# Altium PCB LED_B.PcbDoc
Units mil, origin at the board's own origin, x right, y up, seen from the top; angles counter-clockwise.
Board outline 835 x 2600 mil, 2 copper layers (Top Layer, Bottom Layer); 16 components, 11 nets, 67 pads, 1 vias.
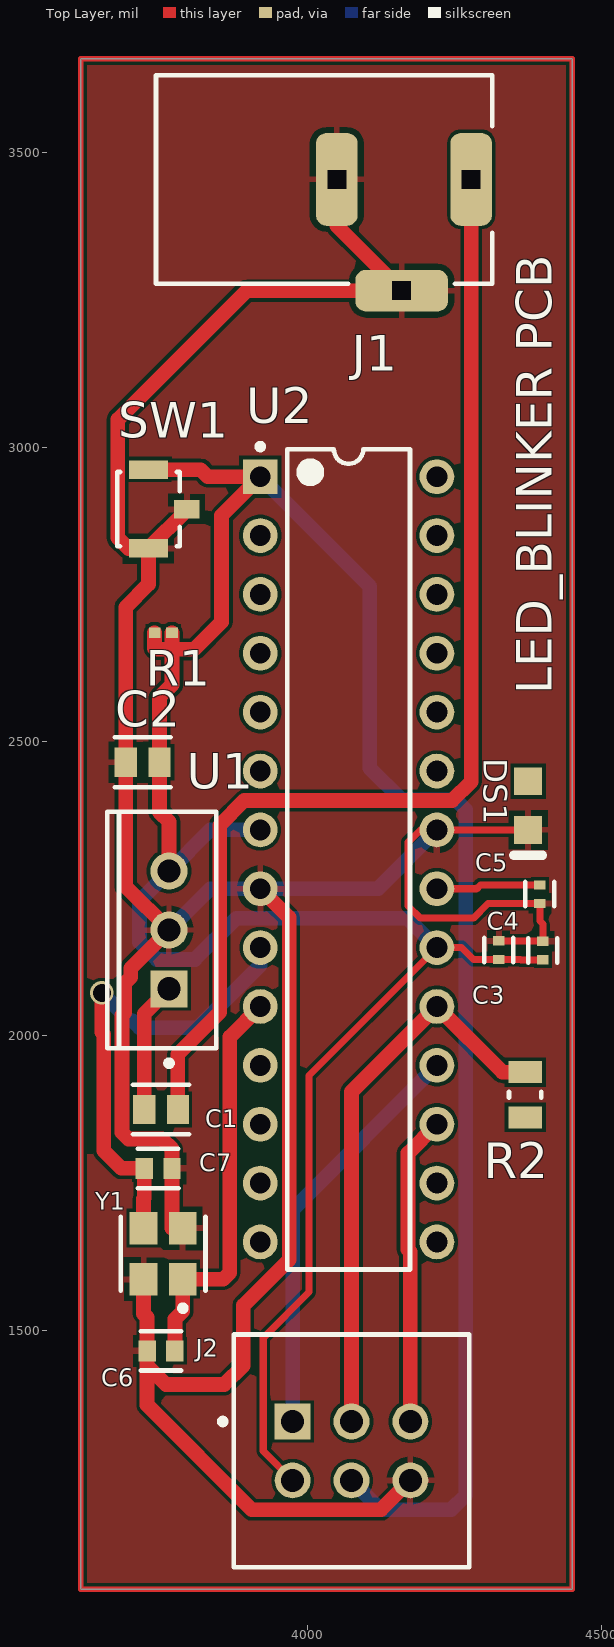
[diagram p0: Top Layer view]
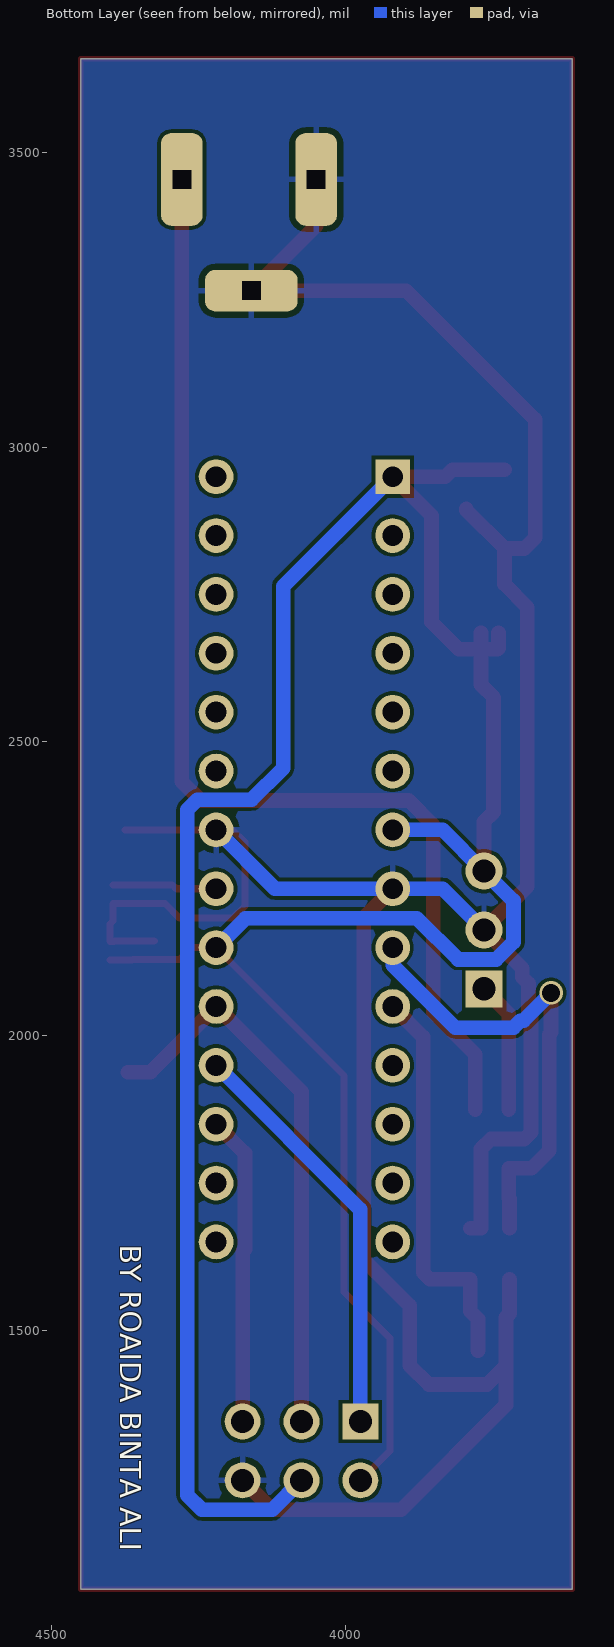
[diagram p1: Bottom Layer view, seen from below]
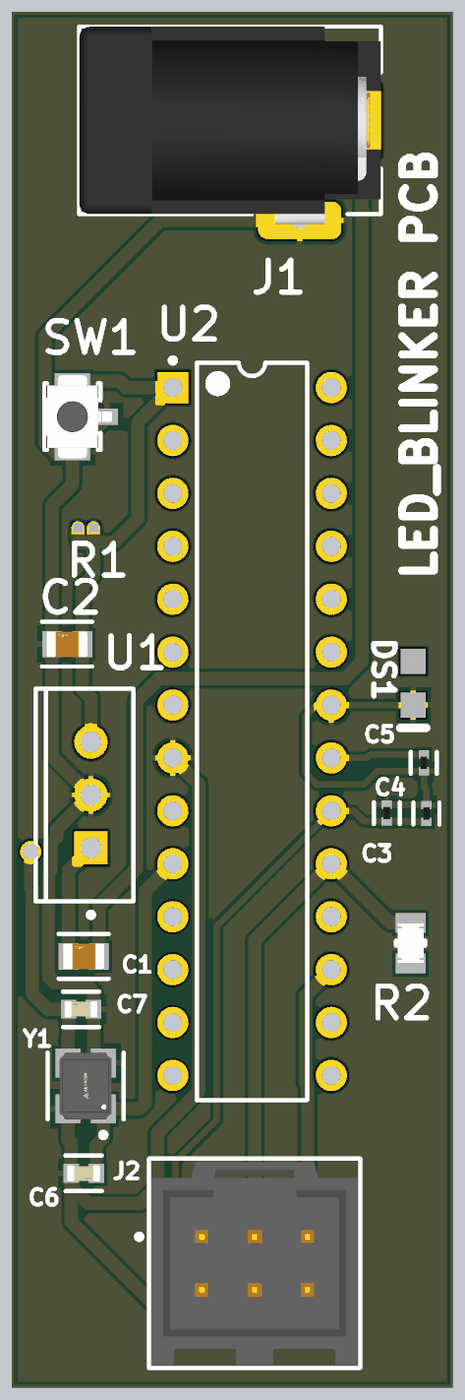
[diagram p2: 3D render of the assembled board from above, using the file's embedded part models]

## Layer stack, top to bottom
Top Solder: solder mask 0.4, Solder Resist, Dk 3.5
Top Layer: signal copper 1.4
Dielectric 1: dielectric 12.6, FR-4, Dk 4.8
Bottom Layer: signal copper 1.4
Bottom Solder: solder mask 0.4, Solder Resist, Dk 3.5

## Board outline
3615,1060 3615,3660 4450,3660 4450,1060

## Design rules (kind name [scope] priority, off if disabled: settings)
Clearance [All] p1: gap=6 ignorepadtopadclearanceinfootprint=TRUE
ComponentClearance [All] p1: gap=10 collisioncheckmode=3 verticalgap=6 showdistances=FALSE
HoleToHoleClearance [All] p1: gap=6 allowstackedmicrovias=TRUE
MinimumSolderMaskSliver [All] p1: minsoldermaskwidth=6
PlaneClearance [All] p1: clearance=10
PlaneConnect [All] p1: planeconnectstyle=Direct reliefexpansion=20 reliefentries=4 reliefconductorwidth=10 reliefairgap=10
PolygonConnect [All] p1: connectstyle=Relief reliefconductorwidth=10 reliefentries=4 polygonreliefangle="90 Angle" airgapwidth=10
RoutingVias [All] p1: holewidth=20 width=30 viastyle="Through Hole" minholewidth=10 minwidth=10 maxholewidth=30 maxwidth=50
SilkToSilkClearance [All] p1: silktosilkclearance=6
SilkToSolderMaskClearance [IsPad] p1: minsilkscreentomaskgap=6 clearancetoexposedcopper=TRUE
SolderMaskExpansion [All] p1: expansion=4 istentingtop=FALSE
SupplyNets "Schematic Supply Nets" [InNet('GND')] p1: voltage=0.000
Width [All] p1: maxlimit=30 minlimit=10 preferedwidth=25
23 further rules are at their usual default settings.

## Components (designator, comment, footprint, x,y, rotation, side; value= is the part's Value field where it differs from the comment)
C1 "10uF" FP-GRM21B-0_1-IPC_C 3751.37,1875 r180 top
C2 "10uF" FP-GRM21B-0_1-IPC_C 3720,2465 r180 top
C3 "100nF" FP-GRM15-MFG 4400,2145 r90 top value=0.10μF
C4 "100nF" FP-GRM15-MFG 4325,2145.75 r270 top value=0.10μF
C5 "100nF" FP-GRM15-MFG 4395,2240.75 r90 top value=0.10μF
C6 "22pF" FP-C0603C-CF-MFG 3751.38,1465 r180 top value="22 pF"
C7 "22pF" FP-C0603C-CF-MFG 3746.38,1775 r0 top value="22 pF"
DS1 "HSMG-C170" AVAG-HSMX-C170_V 4375,2391.34 r270 top
J1 "694108301002" 694108301002 4028.35,3455 r270 top
J2 "90130-1206" FP-90130-1206-MFG 4075,1295 r0 top
R1 "10k" RESC1005X40X25LL05T10 3755.24,2685 r0 top
R2 "330" FP-CRCW0805-e3-MFG 4370,1900 r90 top
SW1 "B3U-1100PM" FP-B3U-1100PM-MFG 3730.04,2895 r90 top
U1 "LM7805CT" FAIR-TO-220-3 3765,2180 r180 top
U2 "ATmega328P-PU" 28P3 4070,2300 r0 top
Y1 "ABM8G-16.000MHZ-18-D2Y-T" FP-ABM8G-MFG 3755,1630 r90 top

## Footprints (in the part's own frame and the unit in brackets; to place one, negate y for a bottom-side part, rotate by r counter-clockwise, add the part's x,y. Pads: shape width x height; smd on the part's side, far side on the other; paste and mask are expansions set on the pad)
28P3 [mm] "28-Pin Plastic Dual In-Line Package (PDIP)"
  rect 1.5x1.5 hole 0.9: 1(-3.81,16.51)
  round 1.5 hole 0.9: 2(-3.81,13.97) 3(-3.81,11.43) 4(-3.81,8.89) 5(-3.81,6.35) 6(-3.81,3.81) 7(-3.81,1.27) 8(-3.81,-1.27) 9(-3.81,-3.81) 10(-3.81,-6.35) 11(-3.81,-8.89) 12(-3.81,-11.43) 13(-3.81,-13.97) 14(-3.81,-16.51) 15(3.81,-16.51) 16(3.81,-13.97) 17(3.81,-11.43) 18(3.81,-8.89) 19(3.81,-6.35) 20(3.81,-3.81) 21(3.81,-1.27) 22(3.81,1.27) 23(3.81,3.81) 24(3.81,6.35) 25(3.81,8.89) 26(3.81,11.43) 27(3.81,13.97) 28(3.81,16.51)
  silkscreen extent -3.93,-17.7 2.65,17.93, body extent -3.6,-17.65 3.6,17.65, height 4.58
694108301002 [mm] "DC Power Jack Right Angled(6.4)"
  rrect50% 4x1.8 hole 0.8 square: 1(0,6.35) 2(0,0.55)
  rrect50% 1.8x4 hole 0.8 square: 3(4.8,3.35)
  silkscreen extent -4.5,-7.25 4.5,7.25, body extent -4.5,-7.25 5,7.25, height 10.75
AVAG-HSMX-C170_V [mm] "SMD, 2-Leads, Body 2x1.25mm, Height 0.8mm"
  rect 1.2x1.2 smd: 1(-1.05,0) 2(1.05,0)
  silkscreen extent 2.15,-0.62 2.15,0.62, body extent -1,-0.63 1,0.63, height 0.8
FAIR-TO-220-3 [mm] "FM, 3-Leads, Body 10.2x4.7mm, Pitch 2.54mm"
  rect 1.6x1.6 hole 1: 1(0,2.54)
  round 1.6 hole 1: 2(0,0) 3(0,-2.54)
  silkscreen extent -2.04,-5.1 2.66,5.87, body extent -2.04,-5.1 2.66,5.1, height 18.95
FP-90130-1206-MFG [mm]
  rect 1.55x1.55 hole 1 paste-2539.97 mask+0: 1(-2.54,1.27)
  round 1.55 hole 1 paste-2539.97 mask+0: 2(-2.54,-1.27) 3(0,1.27) 4(0,-1.27) 5(2.54,1.27) 6(2.54,-1.27)
  silkscreen extent -5.68,-5.02 5.08,5.02, body extent -5.18,-5.13 5.18,5.13, height 0.25
FP-ABM8G-MFG [mm]
  rect 1.4x1.2 smd paste+0 mask+0: 1(-1.1,-0.85) 2(1.1,-0.85) 3(1.1,0.85) 4(-1.1,0.85)
  silkscreen extent -2.47,-1.82 1.6,1.82, body extent -1.9,-1.55 1.9,1.55, height 0.25
FP-B3U-1100PM-MFG [mm]
  rect 0.8x1.7 smd paste+0 mask+0: 1(1.7,0) 2(-1.7,0)
  rect 0.8x1.1 smd paste+0 mask+0: 3(0,-1.65)
  silkscreen extent -1.6,-1.35 1.6,1.35, body extent -2.2,-2.3 2.2,1.45, height 0.25
FP-C0603C-CF-MFG [mm]
  rect 0.75x0.9 smd paste+0 mask+0: 1(-0.6,0) 2(0.6,0)
  silkscreen extent -0.87,-0.85 0.88,0.85, body extent -1.2,-0.6 1.2,0.6, height 0.25
FP-CRCW0805-e3-MFG [mm]
  rect 0.95x1.45 smd paste+0 mask+0: 1(-0.975,0) 2(0.975,0)
  silkscreen extent -0.13,-0.7 0.13,0.7, body extent -1.55,-0.82 1.55,0.82, height 0.25
FP-GRM15-MFG [mm]
  rect 0.4x0.5 smd paste+0 mask+0: 1(-0.4,0) 2(0.4,0)
  silkscreen extent -0.53,-0.62 0.53,0.62, body extent -0.7,-0.38 0.7,0.38, height 0.25
FP-GRM21B-0_1-IPC_C [mil]
  rect 37.71x49.69 smd paste+0 mask+0: 1(-28.63,0) 2(28.63,0)
  silkscreen extent -47,-42 47,42, body extent -51,-31 51,31, height 10
RESC1005X40X25LL05T10 [mm] "Chip Resistor, 2-Leads, Body 1.00x0.50mm, IPC High Density"
  rect 0.5x0.45 smd: 1(-0.375,0) 2(0.375,0)
  body extent -0.53,-0.27 0.53,0.28, height 0.4

## Part data
C1 C2: library part CMP-2007-03453-2, "Chip Multilayer Ceramic Capacitors for General Purpose, 0805, 10uF, X5R, 15%, 10%, 16V", Case Code (Imperial)=0805, Case Code (Metric)=2012, Dielectric=X5R, Max Operating Temperature=85°C, Min Operating Temperature=-55°C, Package Quantity=1, Tolerance=10%, Voltage=16V, Capacitance=10uF, Case/Package=0805, Depth=1.25mm, Height=1.25mm, Lead Free="Lead Free", Length=2mm, Material=Ceramic, Mount="Surface Mount", Packaging="Tape and Reel", Radiation Hardening=No, REACH SVHC="No SVHC", Termination=SMD/SMT, Thickness=0.053inch, Voltage Rating=16V, Voltage Rating (DC)=16V, Width=1.25mm
C3 C4 C5: library part CMP-2100-03641-2, "CAP CER 0.1UF 16V X7R 0402", Capacitance=0.10μF, Manufacturer=Murata, Manufacturer Part Number=GRM155R71C104KA88D, Package=GRM15, Temperature="-55°C to +125°C", Temperature Characteristic=X7R, Temperature Range High=+125°C, Temperature Range Low=-55°C, Tolerance=10%, Voltage Rating=16Vdc, Category=Cap, ComponentLink2Description=Datasheet, ComponentLink2URL=https://search.murata.co.jp/Ceramy/image/img/A01X/G101/ENG/GRM155R71H471KA01-01A.pdf, Device Class L1="Passive Components", Device Class L2=Capacitors, Device Class L3="Ceramic Capacitors", Digikey Description="CAP CER 0.1UF 16V X7R 0402", Height=0.55mm, Ipc Land Pattern Name=CAPC10050X219, Lead Free=yes, Material=Ceramic, Mouser Description="0402 0.1 uF 16V ±10 % Tolerance X7R SMT Multilayer Ceramic Capacitor", Octopart=https://octopart.com/grm155r71c104ka88d-murata-196880, RoHS=TRUE, Standoff Height=0mm
C6 C7: library part CMP-2006-03465-2, "CAP CER 22PF 16V 10% NP0 0603", Capacitance="22 pF", Manufacturer=KEMET, Manufacturer Part Number=C0603C220K4GACTU, Package=C0603C-CF, Temperature="-55°C to +125°C", Temperature Characteristic=C0G, Temperature Coefficient=30ppm/°C, Temperature Range High=+125°C, Temperature Range Low=-55°C, Tolerance=0.1, Voltage Rating="16 V", Automotive=Yes, Automotive Grade="Grade 1", Category=Cap, ComponentLink2Description=Datasheet, ComponentLink2URL=https://api.kemet.com/component-edge/download/datasheet/C0603C100J5GACAUTO.pdf, Device Class L1="Passive Components", Device Class L2=Capacitors, Device Class L3="Ceramic Capacitors", Digikey Description="CAP CER 22PF 16V 10% NP0 0603", Height=0.87mm, Lead Free=Yes, Material=Ceramic, Mouser Description="Multilayer Ceramic Capacitors MLCC - SMD/SMT 16volts 22pF C0G 10%", Octopart=https://octopart.com/c0603c220k4gactu-kemet-17097913, RoHS=TRUE
DS1: library part CMP-2000-05062-1, "Chip LED, Green, 2.2 V, -40 to 85 degC, 2-Pin SMD, Pb-Free, Tape and Reel", Forward Current If=20mA, Forward Voltage=2.2V, Forward Voltage VF Max=2.6V, LED Colour=Green, Manufacturer=Avago, Operating Temperature Max=85degC, Operating Temperature Min=-30degC, Operating Temperature Range=-30degCto+85degC, Opto Case Style=SMD, Package Description="2-Pin Surface Mount Device, Body 2 x 1.25 mm, Height 0.8 mm", Package Reference=HSMX-C170, Storage Temperature Min=-40degC, Bulb Size=1.25mmx1.4mm, Datasheet URL=https://datasheet.ciiva.com/29280/180495-da-01-en-chip-led-hsmg-c170-gelb-gruen-29280971.pdf, Datasheet Version=Oct-08, Dominant Wavelength=572nm, Dominant Wavelength Typ=572nm, External Depth=0.8mm, External Length / Height=2mm, External Width=1.25mm, Forward Current If Max=20mA, LED Mounting=SMD, LED Type=Standard, Lens Shape=Rectangular, Light Area Height=1mm, Luminous Intensity=15mcd, Luminous Intensity Min=4mcd, Luminous Intensity Typ=15mcd, Manufacturer URL=http://www.avagotech.com/, Mounting Type=SMD, MSL=MSL2A-4weeks, No. of Pins=2, Opto Mounting Orientation=Top, Packaging=CutTape, Peak Forward Current=20mA, Peak Wavelength=570nm, PIV Max=5V, Storage Temperature Max=85degC, SVHC=NoSVHC(16-Jun-2014), Viewing Angle=170deg, Voltage Vf Typ=2.2V, Wavelength Typ=570nm
J1: library part CMP-1502-00190-3, Color=Black, Current Rating=5A, Flammability Rating="UL94 V-0", Insulation Resistance=100MΩ, Max Operating Temperature=85°C, Min Operating Temperature=-40°C, Operating Supply Voltage=24V, Voltage Rating (DC)=20V, Connector Type=Power, Contact Gender=Female, Contact Material="Gold, Tin", Contact Plating=Tin, Gender=Male, Height=11mm, Housing material=Polyamide, Mount="Through Hole", NexarPartId=52676102, Number of Contacts=3, Packaging=Bulk, REACH SVHC=Unknown, RoHS=Compliant, Shielding=Unshielded, Termination="Through Hole", Voltage Rating=24V
J2: library part CMP-04776-000468-1, "CONN HEADER VERT 6POS 2.54MM", Color=Black, Contact Resistance=20mR, Current Rating=3A, Insulation Resistance=5GR, Max Current Rating=3.9A, Max Operating Temperature=125°C, Max Voltage Rating (AC)=500V, Max Voltage Rating (DC)=350.35kV, Min Operating Temperature=-55°C, Package Quantity=2560, Voltage Rating=350V, Contact Gender=Male, Contact Material=Brass, Contact Plating=Gold, Depth=3.94mm, Gender=Male, Glow Wire Compliant=Non-compliant, Height=4.7mm, Housing Color=Black, Housing material=Polyester, Lead Free="Lead Free", Lead Pitch=2.54mm, Length=8mm, Material=Glass, Mount="Through Hole", Number of Circuits=6, Number of Contacts=6, Number of Poles=6, Number of Positions=6, Number of Rows=2, Orientation=Vertical, Packaging=Tray, Pitch=2.54mm, Radiation Hardening=No, Row Spacing=2.54mm, Series=90130, Termination=Solder, Voltage Rating (AC)=350V, Voltage Rating (DC)=350V, Working Voltage=350V
R1: library part CMP-2002-07353-1, Manufacturer="Yageo / Phycomp", Part Number=RC0402FR-0710KL
R2: library part CMP-2001-03823-2, "RES Thick Film, 330Ω, 1%, 0.125W, 100ppm/°C, 0805", Case Code (Imperial)=0805, Case Code (Metric)=2012, Max Operating Temperature=155°C, Max Power Dissipation=125mW, Min Operating Temperature=-55°C, Package Quantity=10, Resistance=330R, Temperature Coefficient=100ppm/°C, Tolerance=1%, Voltage Rating=150V, Case/Package=0805, Composition="Thick Film", Contact Plating=Tin, Depth=1.25mm, Features="Automotive AEC-Q200", Height=0.02inch, Lead Free="Lead Free", Length=2mm, Military Standard=Not, Mount="Surface Mount", Number of Terminations=2, Packaging="Tape and Reel", Power Rating=125mW, Termination=SMD/SMT, Voltage Rating (DC)=150V, Weight=0.000194oz, Width=0.049inch
SW1: library part CMP-08834-000028-1, "SWITCH TACTILE SPST-NO 0.05A 12V", Case/Package=SMD/SMT, Contact Resistance=100mR, Current Rating=50mA, Max Operating Temperature=70°C, Max Voltage Rating (DC)=12V, Min Operating Temperature=-25°C, Operating Force=1.5N, Package Quantity=1000, Ratings="Dust Proof", Actuator Length=0.4mm, Actuator Type=Standard, Connector Type=SMD/SMT, Electrical Life=200000Cycles, Illumination Type=Non-Illuminated, Mechanical Life=200000Cycles, Mount="Surface Mount", Orientation=Straight, Packaging="Tape and Reel", REACH SVHC="No SVHC", RoHS Compliant=Yes, Series=B3U, Switch Function=Off-Mom, Switch Travel=0.15mm, Termination=SMD/SMT, Throw Configuration=SPST, Voltage Rating (DC)=12V, Weight=0.022g
U1: library part CMP-2000-04938-1, "Positive Voltage Regulator, 5 V, 1 A, -40 to 125 degC, 3-Pin TO-220, RoHS, Tube", Manufacturer=FairchildSemiconductor, Maximum Input Voltage=35V, Maximum Output Current=2.2(Typ)A, Maximum Quiescent Current=8mA, Operating temperature=-40to125degC, Output Voltage=5V, Package=3TO-220AB, Package Description="3-Pin Through Hole Device, Body 10 x 4.5 mm, Pitch 2.54 mm", Package Reference=TO-220, Typical Dropout Voltage @ Current=2@1AV, Accuracy=±4%, Category=LinearRegulator, Datasheet URL=https://datasheet.ciiva.com/26904/lm7805ct-26904988.pdf, Datasheet Version=Aug-12, Line Regulation=100mV, Load Regulation=100mV, Manufacturer URL=https://www.fairchildsemi.com/, Mounting=ThroughHole, Number of Outputs=1, Output Type=Fixed, Package URL=https://www.fairchildsemi.com/package-drawings/TO/TO220B03.pdf, Packaging=Rail/Tube, Polarity=Positive, Rad Hard=No, Type=Linear
U2: library part CMP-0095-00013-2, "8-bit AVR Microcontroller, 32KB Flash, 1KB EEPROM, 2KB SRAM, 28-pin PDIP, Industrial Grade (-40°C to 85°C)", ComponentLink1Description="Manufacturer URL", ComponentLink1URL=http://www.atmel.com/, ComponentLink2Description="ATmega48A/48PA/88A/88PA/168A/168PA/328/328P Datasheet", ComponentLink2URL=http://www.atmel.com/dyn/resources/prod_documents/8271.pdf, ComponentLink3Description="ATmega48A/48PA/88A/88PA/168A/168PA/328/328P Summary", ComponentLink3URL=http://www.atmel.com/dyn/resources/prod_documents/8271S.pdf, DatasheetVersion="revD, May-2011", PackageDescription="28-lead (0.300\"/7.62mm Wide) Plastic Dual Inline Package (PDIP)", PackageReference=28P3, PackageVersion="revB, Sep-2001", RevisionNote="DatasheetVersion updated. URLs added."
Y1: library part CMP-27762-006537-2, "Crystal 16MHz ±20ppm (Tol) ±30ppm (Stability) 18pF FUND 80Ω 4-Pin SMD T/R", Case/Package=CSMD, ESR (Equivalent Series Resistance)=80R, Frequency=16MHz, Frequency Stability=30ppm, Frequency Tolerance=20ppm, Load Capacitance=18pF, Max Operating Temperature=85°C, Min Operating Temperature=-40°C, Operating Frequency="16 MHz", Package Quantity=1000, Depth=2.5mm, Height=1mm, Lead Free="Lead Free", Length=3.2mm, Mount="Surface Mount", Number of Pins=4, Packaging="Tape and Reel", Radiation Hardening=No, Series=ABM8G, Series Resistance=80R, Termination=SMD/SMT, Tolerance=20ppm, Width=2.5mm

## Via types
v1: diameter 40, hole 30, Top Layer to Bottom Layer, 1 vias

## Nets (pads, with @x,y where several pads share a name; then routed paths per layer and width w, separated by ;. In a path a pad name is that pad's centre, name@x,y a point inside that pad or via, vN(x,y) a via of type N, cw(c..) or ccw(c..) an arc to the next point about the centre after c; other vN are vias at no path point)
GND: C2.2 C3.2 C4.1 C5.1 C6.2 C7.2 DS1.2 J1.2 J1.3 J2.6 SW1.2 SW1.3 U1.2 U2.8 U2.22 Y1.2 Y1.4 | length 5524.4
  Top Layer w12: C4.1 4392.25,2161.5 4393,2160.75 C3.2 4400,2190 4395,2195 C5.1 4307,2225 4282,2200 4192,2200 4171,2221 4171,2329 4192,2350 U2.22 4297,2350 DS1.2
  Top Layer w25: Y1.4 3721.54,1528.22 3727.76,1522 C6.2 3727.76,1440 ; Y1.2 3770,1673.31 C7.2 3770,1808 3753,1825 3696,1825 3685,1836 3685,2035.06 3689.5,2039.56 3689.5,2089.5 3700,2100 3700,2115 U1.2 3691.37,2253.63 C2.2 3691.37,2728.37 3730.04,2767.04 SW1.2 ; SW1.3 3795,2893.03 SW1.2 ; U2.8 3969,2201 3969,1620 3891,1542 3891,1440 3859,1408 3759.76,1408 3727.76,1440 ; J1.2 4050,3376.26 J1.3 3897.02,3266.02 3678,3047 3678,2846.07 3696,2828.07 SW1.2 ; J2.6 4125,1195 3905.76,1195 3727.76,1373 3727.76,1440
  Bottom Layer w25: U1.2 3835,2250 U2.8 4120,2250 U2.22
MISO: J2.1 U2.18 | length 706.5
  Bottom Layer w25: J2.1 3975,1705 U2.18
MOSI: J2.5 U2.17 | length 527
  Top Layer w25: J2.5 4175,1633 4171,1637 4171,1801 U2.17
NetC1_1: C1.1 J1.1 | length 1993.4
  Top Layer w25: C1.1 3780,1969 3851,2040 3851,2358 3893,2400 4246.35,2400 4278.35,2432 J1.1
NetC1_2: C1.2 U1.1 | length 222.5
  Top Layer w25: C1.2 3722.74,2037.74 U1.1
NetC5_2: C5.2 U2.21 | length 177.7
  Top Layer w12: U2.21 4287.62,2250 4294.12,2256.5 C5.2
RESET: J2.4 R1.1 SW1.1 U2.1 | length 2782.4
  Top Layer w25: SW1.1 3819,2961.93 3830.93,2950 U2.1 3854,2884 3854,2703 3808,2657 3742,2657 3740.47,2658.53 R1.1
  Bottom Layer w25: U2.1 4106,2764 4106,2455 4160,2401 4252,2401 4269,2384 4269,1220 4244,1195 4125,1195 J2.4
SCK: J2.3 R2.2 U2.19 | length 961.3
  Top Layer w25: J2.3 4075,1905 U2.19 4331.61,1938.39 R2.2
VCC: C2.1 C3.1 C4.2 J2.2 R1.2 U1.3 U2.7 U2.20 | length 2549.6
  Top Layer w12: J2.2 3925,1295 3925,1487 4003,1565 4003,1933 U2.20 4262,2150 4282,2130 C4.2 4362,2130 4362.75,2129.25 C3.1
  Top Layer w25: U1.3 3765,2364 3748.63,2380.37 C2.1 3748.63,2575 3770,2596.37 R1.2
  Bottom Layer w25: U2.7 3835,2350 U1.3 3715,2230 3715,2159 3744,2130 3809,2130 3879,2200 4170,2200 U2.20
XTAL1: C7.1 U2.9 Y1.3 | length 820
  Top Layer w25: v1(3651,2073) 3651,2006 3654,2003 3654,1805 3684,1775 C7.1 3722.76,1724.22 3721.54,1723 Y1.3
  Bottom Layer w25: v1(3651,2073) 3698,2026 3703,2026 3715,2014 3814,2014 3920,2120 U2.9
XTAL2: C6.1 U2.10 Y1.1 | length 685.2
  Top Layer w25: C6.1 3775,1519 3788.46,1532.46 Y1.1 3857,1586.69 3868,1597.69 3868,1998 U2.10
pads on no net: DS1.1 R2.1 U2.2 U2.3 U2.4 U2.5 U2.6 U2.11 U2.12 U2.13 U2.14 U2.15 U2.16 U2.23 U2.24 U2.25 U2.26 U2.27 U2.28
copper on no net: | length 6870
  Top Layer w10: 3615,1060 4450,1060 4450,3660 3615,3660 3615,1060

## Polygon pours and split planes (outlines as drawn)
GND on Top Layer "GND_L01_P000" (solid, pour order 0): 3615,3660 4450,3660 4450,1060 3615,1060
GND on Bottom Layer "GND_L02_P001" (solid, pour order 1): 3615,3660 4450,3660 4450,1060 3615,1060

## Silkscreen, mask and mechanical layers (free items; w line width, h text height)
Top Overlay:
  text "LED_BLINKER PCB" at 4415,2580 h60 r90
Bottom Overlay:
  text "BY ROAIDA BINTA ALI" at 4395,1645 h60 r90